# Altium PCB CH32V006K8U6-R0-1v0.PcbDoc
Units mil, origin at the board's own origin, x right, y up, seen from the top; angles counter-clockwise.
Board outline 1653.54 x 1574.8 mil, 2 copper layers (Top Layer, Bottom Layer); 27 components, 45 nets, 148 pads, 199 vias.
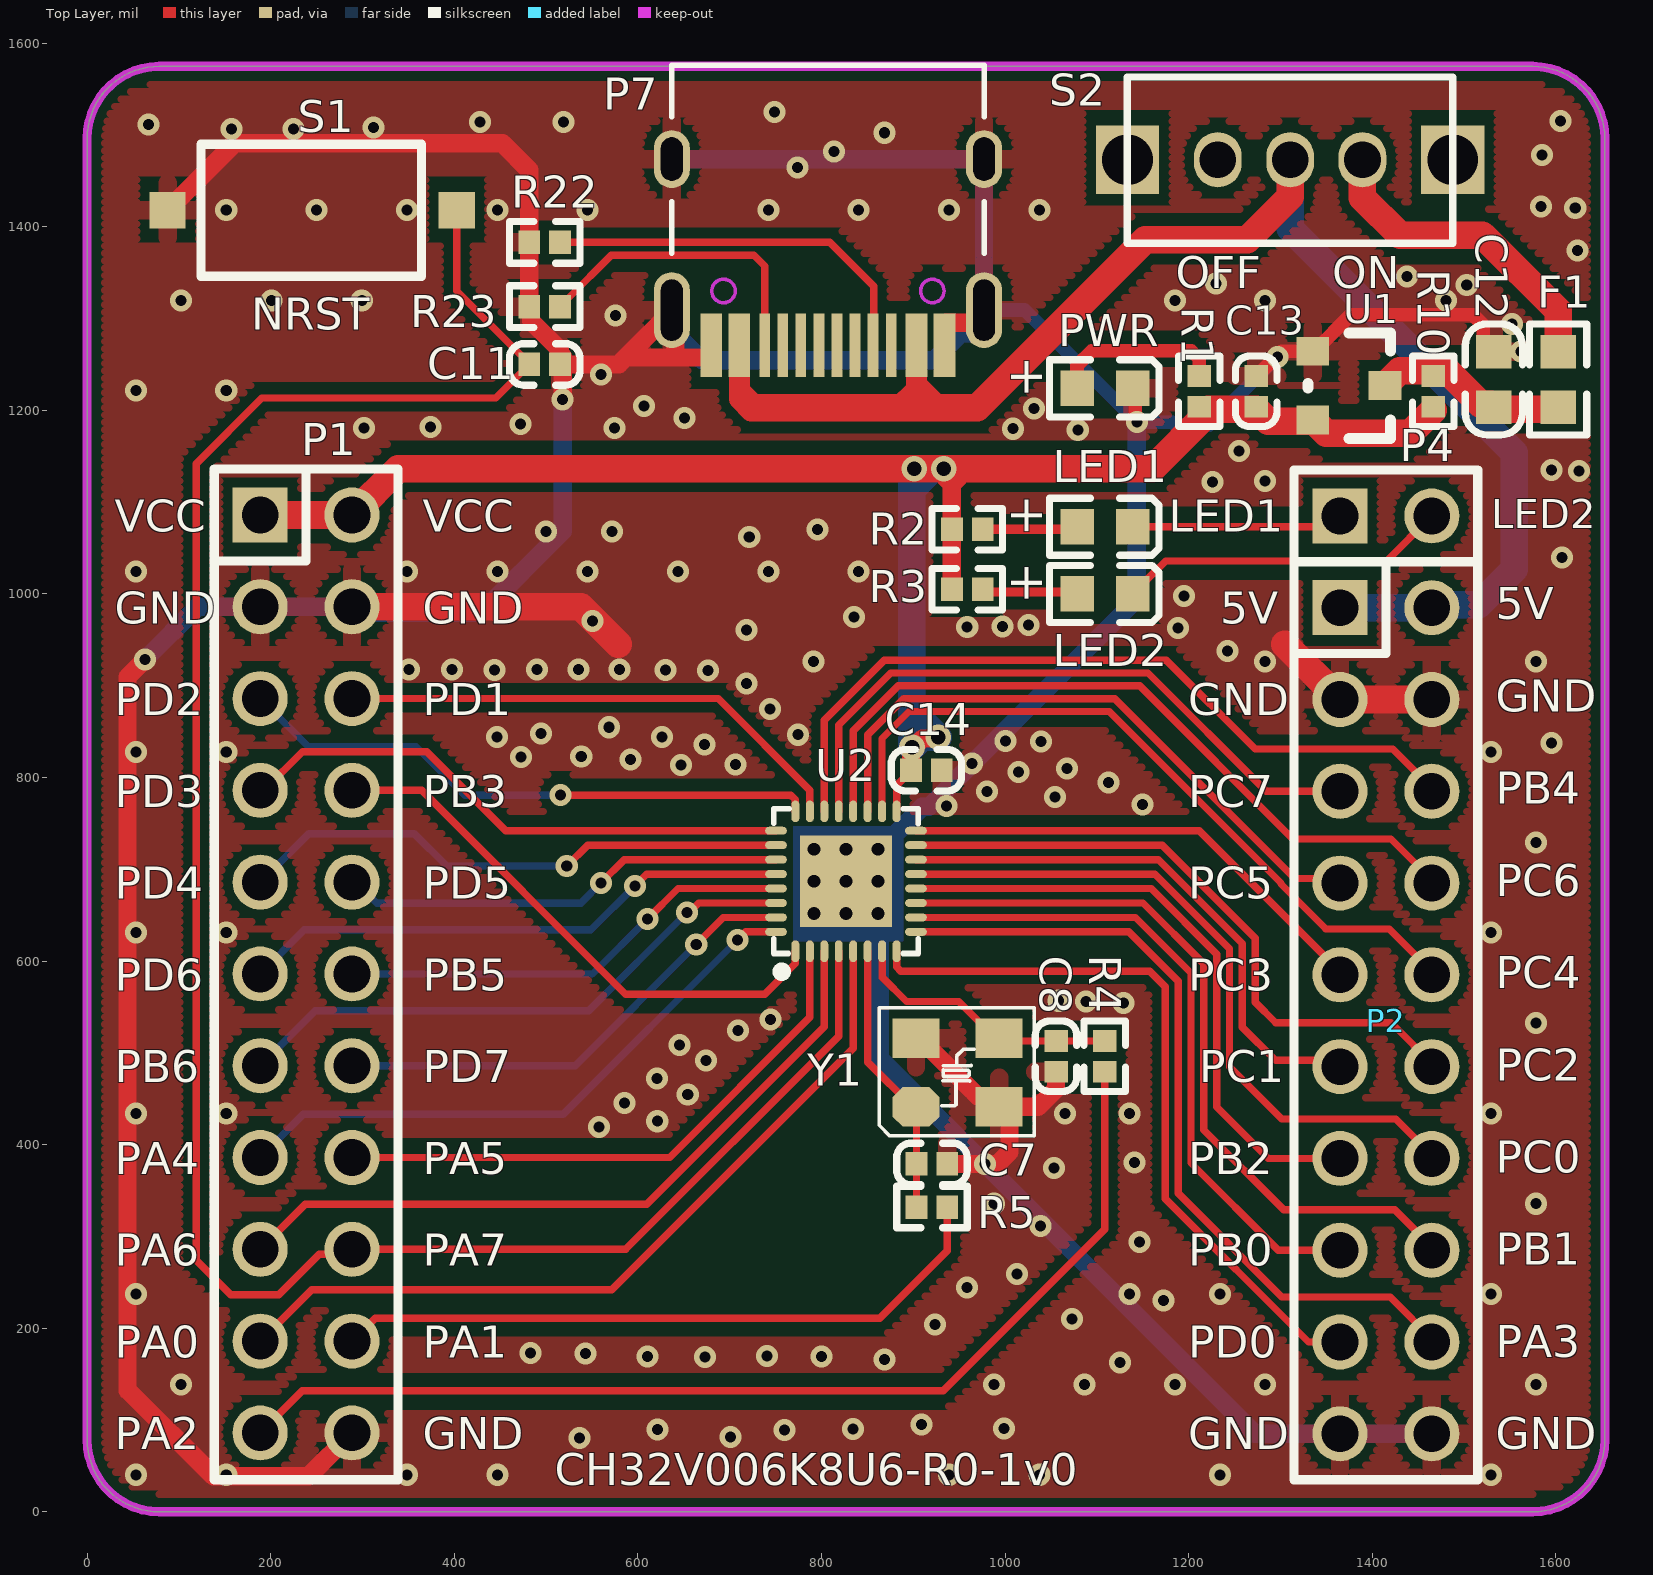
[diagram p0: Top Layer view]
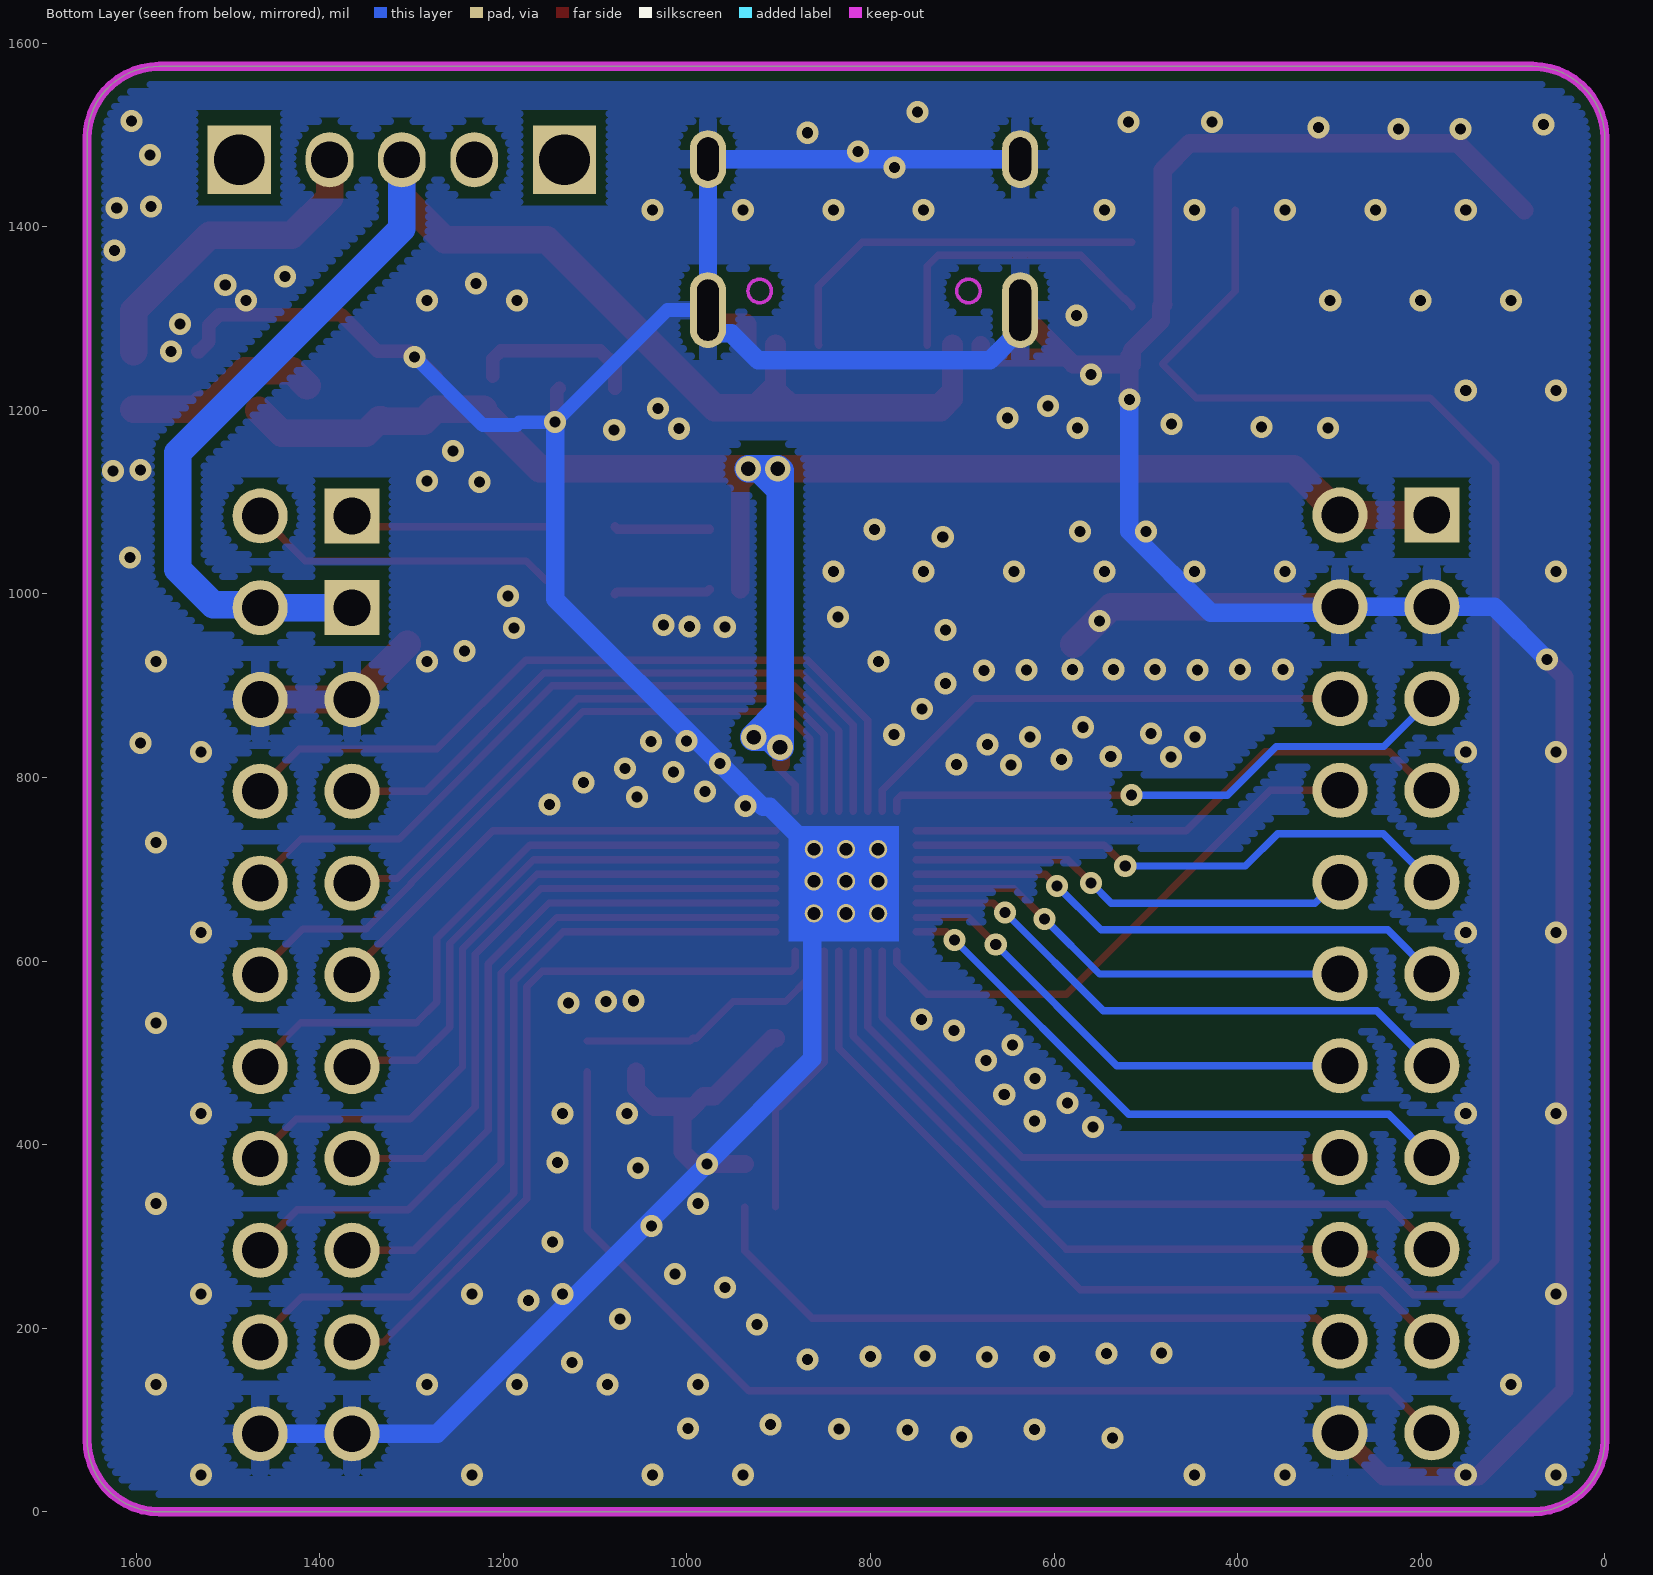
[diagram p1: Bottom Layer view, seen from below]

## Layer stack, top to bottom
Top Solder: solder mask 0.4, Solder Resist, Dk 3.5
Top Layer: signal copper 1.4
Dielectric1: dielectric 12.6, FR-4, Dk 4.8
Bottom Layer: signal copper 1.4
Bottom Solder: solder mask 0.4, Solder Resist, Dk 3.5

## Board outline
0,78.71 0,1496.06 cw(c78.74,1496.06) 78.74,1574.8 1574.8,1574.8 cw(c1574.8,1496.06) 1653.54,1496.06 1653.54,78.74 cw(c1574.8,78.74) 1574.8,0 78.71,0 78.74,0 cw(c78.74,78.74)

## Design rules (kind name [scope] priority, off if disabled: settings)
Clearance Clearance_1 [InPolygon] p1: gap=10 ignorepadtopadclearanceinfootprint=FALSE except(0: Arc-Hole Track-Hole SMDPad-Hole THPad-Hole Via-Hole Fill-Hole Poly-Hole Region-Hole Text-Hole)
Clearance [All] p2: gap=6 ignorepadtopadclearanceinfootprint=FALSE except(0: Arc-Hole Track-Hole SMDPad-Hole THPad-Hole Via-Hole Fill-Hole Poly-Hole Region-Hole Text-Hole)
ComponentClearance [All] p1 off: gap=10 collisioncheckmode=3 verticalgap=10 showdistances=FALSE
DiffPairsRouting [All] p1: maxlimit=10 minlimit=7 mostfreqgap=8 toplayer_minwidth=15 toplayer_maxwidth=15 toplayer_prefwidth=15 bottomlayer_minwidth=15 bottomlayer_maxwidth=15 bottomlayer_prefwidth=15 maxuncoupledlength=500
MinimumSolderMaskSliver [All] p1 off: minsoldermaskwidth=10
PolygonConnect PolygonConnect_1 [IsVia] p1: connectstyle=Direct reliefconductorwidth=10 reliefentries=4 polygonreliefangle="90 Angle" airgapwidth=10
PolygonConnect [All] p2: connectstyle=Relief reliefconductorwidth=20 reliefentries=4 polygonreliefangle="90 Angle" airgapwidth=10
RoutingVias [All] p1: holewidth=16 width=28 viastyle="Through Hole" minholewidth=12 minwidth=24 maxholewidth=28 maxwidth=50
SilkToSilkClearance [All] p1 off: silktosilkclearance=10
SilkToSolderMaskClearance [IsPad] p1 off: minsilkscreentomaskgap=10 clearancetoexposedcopper=TRUE
SolderMaskExpansion [All] p1: expansion=2 istentingtop=FALSE
Width [All] p1: maxlimit=100 minlimit=6 preferedwidth=10
25 further rules are at their usual default settings.

## Components (designator, comment, footprint, x,y, rotation, side; value= is the part's Value field where it differs from the comment)
C7 "22pF" 0402_C 937.09,379 r270 top
C8 "22pF" 0402_C 1055.63,479.54 r180 top
C11 "0.1uF" 0402_C 515.17,1250 r270 top
C12 "10uF" 0603_C 1532.63,1203.37 r90 top
C13 "2.2uF" 0402_C 1273.63,1237.46 r0 top
C14 "0.1uF" 0402_C 897.63,808 r90 top value=15pF
F1 "500mA" 0603 1602.63,1264 r270 top
LED1 "LED1   blue" 0603+ 1078.54,1073.24 r0 top
LED2 "LED2  blue" 0603+ 1078.54,1000 r0 top
P1 "Header 11X2" IDC22-2.54mm 188.54,1086 r0 top
P2 "Header 10X2" IDC20-2.54mm 1365,985 r0 top
P4 "2HEAD" SIP2-2.54mm 1365,1085 r270 top
P7 "TYPE-C" TYPE-C-Receptacle-2.0 807.09,1271 r180 top
PWR "POWER  red" 0603+ 1078.54,1224 r0 top
R1 "1K" 0402 1211.63,1237.46 r270 top
R2 "1K" 0402 942.17,1070.43 r0 top
R3 "1K" 0402 942.17,1005 r0 top
R4 "0R" 0402 1108.63,513 r270 top value=NC(0R)
R5 "0R" 0402 903.63,332 r0 top value=NC(0R)
R10 "0R" 0402 1466.63,1237.46 r270 top value=NC(0R)
R22 "5.1K" 0402 515.17,1383 r180 top
R23 "5.1K" 0402 515.17,1313 r180 top
S1 "NRST" SMD_6.1x3.65x2.5mm-KEY 402.63,1418 r180 top
S2 "SW" SW1 1310.63,1473 r0 top
U1 "6219P33M" SOT-23 1374.63,1227 r270 top
U2 "CH32V006K8U6" QFN32_4X4 826.76,686.91 r0 top
Y1 "24MHz" XT3225 903.08,441.2 r0 top

## Footprints (in the part's own frame and the unit in brackets; to place one, negate y for a bottom-side part, rotate by r counter-clockwise, add the part's x,y. Pads: shape width x height; smd on the part's side, far side on the other; paste and mask are expansions set on the pad)
0402 [mm]
  rect 0.6x0.65 smd mask+0.051: 1(0,0) 2(0.85,0)
  silkscreen extent -0.55,-0.58 1.4,0.57
0402_C [mm]
  rect 0.65x0.6 smd mask+0.051: 1(0,0) 2(0,-0.85)
  silkscreen extent -0.58,-1.4 0.57,0.55
0603 [mm]
  rect 0.93x0.98 smd: 1(0,0) 2(1.54,0)
  silkscreen extent -0.76,-0.79 2.3,0.79
0603+ [mm]
  rect 0.93x0.98 smd: 1(0,0) 2(1.54,0)
  silkscreen extent -0.76,-0.79 2.27,0.79
0603_C [mm]
  rect 0.93x0.98 smd mask+0.051: 1(0,0) 2(1.54,0)
  silkscreen extent -0.76,-0.79 2.31,0.79
IDC20-2.54mm [mil]
  rect 60x60 hole 40: 1(0,0)
  round 60 hole 40: 2(100,0) 3(0,-100) 4(100,-100) 5(0,-200) 6(100,-200) 7(0,-300) 8(100,-300) 9(0,-400) 10(100,-400) 11(0,-500) 12(100,-500) 13(0,-600) 14(100,-600) 15(0,-700) 16(100,-700) 17(0,-800) 18(100,-800) 19(0,-900) 20(100,-900)
  silkscreen extent -50,-950 150,50
IDC22-2.54mm [mil]
  rect 60x60 hole 40: 1(0,0)
  round 60 hole 40: 2(100,0) 3(0,-100) 4(100,-100) 5(0,-200) 6(100,-200) 7(0,-300) 8(100,-300) 9(0,-400) 10(100,-400) 11(0,-500) 12(100,-500) 13(0,-600) 14(100,-600) 15(0,-700) 16(100,-700) 17(0,-800) 18(100,-800) 19(0,-900) 20(100,-900) 21(0,-1000) 22(100,-1000)
  silkscreen extent -50,-1051 150,50
QFN32_4X4 [mm]
  round 0.508 hole 0.356: 0(-0.889,-0.887) 0(-0.889,0.887) 0(0,0) 0(0.889,-0.887) 0(0.889,0.887)
  rect 2.54x2.54 smd mask+0.051: 0(0,0)
  oval 0.22x0.6 smd mask+0.051: 1(-1.4,-1.936) 2(-1,-1.936) 3(-0.6,-1.936) 4(-0.2,-1.936) 5(0.2,-1.936) 6(0.6,-1.936) 7(1,-1.936) 8(1.4,-1.936) 17(1.4,1.936) 18(1,1.936) 19(0.6,1.936) 20(0.2,1.936) 21(-0.2,1.936) 22(-0.6,1.936) 23(-1,1.936) 24(-1.4,1.936)
  oval 0.6x0.22 smd mask+0.051: 9(1.936,-1.4) 10(1.936,-1) 11(1.936,-0.6) 12(1.936,-0.2) 13(1.936,0.2) 14(1.936,0.6) 15(1.936,1) 16(1.936,1.4) 25(-1.936,1.4) 26(-1.936,1) 27(-1.936,0.6) 28(-1.936,0.2) 29(-1.936,-0.2) 30(-1.936,-0.6) 31(-1.936,-1) 32(-1.936,-1.4)
  silkscreen extent -2,-2.63 2,2
SIP2-2.54mm [mil]
  rect 60x60 hole 40: 1(0,0)
  round 60 hole 40: 2(0,100)
  silkscreen extent -50,-50 50,150
SMD_6.1x3.65x2.5mm-KEY [mm]
  rect 1x1 smd: 1(0,0) 2(8,0)
  silkscreen extent 0.98,-1.83 7.08,1.83
SOT-23 [mm]
  rect 0.8x0.9 smd: 1(-0.95,-1) 2(0.95,-1) 3(0,1)
  silkscreen extent -1.46,-1.14 1.46,1.15
SW1 [mm]
  rect 1.75x1.9 hole 1.4: 0(-4.5,0) 0(4.5,0)
  oval 1.321x1.524 hole 1.016: 1(0,0) 2(-2,0) 3(2,0)
  silkscreen extent -4.51,-2.31 4.5,2.29
TYPE-C-Receptacle-2.0 [mm]
  oval 1x2.1 hole 0.6 slot 1.7 at 90 deg: 0(-4.32,-0.97) 0(4.32,-0.97)
  oval 1x1.6 hole 0.6 slot 1.2 at 90 deg: 0(-4.32,-5.15) 0(4.32,-5.15)
  rect 0.6x1.75 smd mask+0.051: A1(-3.225,0) A4(-2.45,0) B1(3.225,0) B4(2.45,0)
  rect 0.3x1.75 smd mask+0.051: A5(-1.25,0) A6(-0.25,0) A7(0.25,0) A8(1.25,0) B5(1.75,0) B6(0.75,0) B7(-0.75,0) B8(-1.75,0)
  Keep-Out Layer circle w0.1: c-2.89,-1.5 r0.325
  Keep-Out Layer circle w0.1: c2.89,-1.5 r0.325
  silkscreen extent -4.32,-7.75 4.32,-2.55
XT3225 [mm]
  oct 1.3x1.1 smd: 1(0,0)
  rect 1.3x1.1 smd: 2(2.3,0) 3(2.3,1.9) 4(0,1.9)
  silkscreen extent -1.02,-0.8 3.27,2.74

## Part data
C7 C8 C12 C13: library part CAP, "Capacitor"
C11 C14: library part Cap, "Capacitor", LatestRevisionDate=17-Jul-2002, LatestRevisionNote="Re-released for DXP Platform.", PackageReference=RAD-0.3, Published=8-Jun-2000, Publisher="Altium Limited"
F1: library part FUSE1, "Fuse"
LED1 LED2 PWR: library part LED0, "Typical INFRARED GaAs LED", LatestRevisionDate=08-Jul-2005, LatestRevisionNote="Mech Layer 1 removed.", PackageReference=LED-0, Published=8-Jun-2000, Publisher="Altium Limited"
P1: "Header, 11-Pin, Dual row", LatestRevisionDate=17-Jul-2002, LatestRevisionNote="Re-released for DXP Platform.", Publisher="Altium Limited"
P2: "Header, 10-Pin, Dual row", LatestRevisionDate=17-Jul-2002, LatestRevisionNote="Re-released for DXP Platform.", Publisher="Altium Limited"
P7: library part TYPE-C1
R1 R2 R3 R4 R5 R10: library part "Res Semi", "Semiconductor Resistor", LatestRevisionDate=17-Jul-2002, LatestRevisionNote="Re-released for DXP Platform.", PackageReference=AXIAL-0.5, Published=8-Jun-2000, Publisher="Altium Limited"
R22 R23: library part Res2, "Resistor"
S1: library part KEY
U2: "RISC-V MCU, 48MHz, ADC/OPA/2*UART/I2C/SPI"
Y1: library part XTAL, "Crystal Oscillator", LatestRevisionDate=17-Jul-2002, LatestRevisionNote="Re-released for DXP Platform.", PackageDescription="Crystal, Thru-Hole; 2 Leads; Body 3.1 x 8.2 mm (Dia.xH)", PackageReference=R38, Published=8-Jun-2000, Publisher="Altium Limited"

## Via types
v1: diameter 24, hole 12, Top Layer to Bottom Layer, tented both sides, 131 vias
v2: diameter 24.02, hole 12, Top Layer to Bottom Layer, tented both sides, 60 vias
v3: diameter 28, hole 16, Top Layer to Bottom Layer, tented both sides, 4 vias
v4: diameter 20, hole 14, Top Layer to Bottom Layer, tented both sides, 4 vias

## Nets (pads, with @x,y where several pads share a name; then routed paths per layer and width w, separated by ;. In a path a pad name is that pad's centre, name@x,y a point inside that pad or via, vN(x,y) a via of type N, cw(c..) or ccw(c..) an arc to the next point about the centre after c; other vN are vias at no path point)
+5V: P2.1 P2.2 P7.A4 P7.B4 S2.1 | length 1680.7
  Top Layer w23: P7.B4 710.63,1221.55 ; 722.98,1209.2 710.63,1221.55 ; 723.38,1199.58 710.63,1212.32 710.63,1221.55 ; 883.63,1203 903.54,1222.91 903.54,1228.09 ; P7.A4 903.54,1228.09 ; 928.63,1203 903.54,1228.09
  Top Layer w30: 725.63,1203 883.63,1203 928.63,1203 969.63,1203 1152.63,1386 1264.06,1386 1310.63,1432.57 S2.1
  Bottom Layer w30: S2.1 1310.63,1397.87 1554.77,1153.73 1554.77,1026.96 1516,988.19 1468.19,988.19 P2.2 P2.1
GND: C7.1 C8.1 C11.1 C12.2 C13.1 C14.2 P1.3 P1.4 P1.22 P2.3 P2.4 P2.19 P2.20 P7.0 P7.A1 P7.B1 PWR.2 R22.2 R23.2 S1.2 U1.1 U2.0 Y1.2 Y1.4 | length 6913
  Top Layer w15: PWR.2 1141.91,1221.27 1141.91,1188.81 v1(1143.63,1187.09) ; C13.1 1274.61,1237.46 1301.55,1264.4 U1.1 1337.23,1264.4 1377.08,1304.26 1509.5,1304.26 1520.95,1292.81 1520.95,1274.81 1531.76,1264 C12.2
  Top Layer w20: v1(63.24,928.69) 43.97,909.42 43.97,132.62 137.91,38.68 241.23,38.68 P1.22 ; S1.2 160.67,1491 452.35,1491 481.71,1461.64 R22.2 481.71,1315.8 481.17,1315.26 483.52,1312.91 483.52,1297.42 515.17,1265.77 C11.1 C11.1@518.05,1250 ; v1(518.05,1211.98) C11.1@518.05,1250 ; C11.1@518.05,1258.71 C11.1@518.05,1250 ; 591.41,1257.66 640.71,1257.66 ; P7.0@622.33,1293.29 579.04,1250 C11.1@518.05,1250 ; P7.0@637.01,1309.19 640.71,1305.48 640.71,1257.66 ; P7.B1 680.12,1259.47 678.31,1257.66 640.71,1257.66 ; Y1.4 907.02,516 970.17,452.85 981.98,452.85 Y1.2 ; P7.A1 934.05,1293.64 935.87,1295.45 968.22,1295.45 977.17,1304.4 P7.0@977.17,1309.19 ; C7.1 v1(978.28,379) 991.75,379 1004.84,392.09 1004.84,429.99 Y1.2 ; C8.1 1055.63,460.81 1036.02,441.2 Y1.2
  Top Layer w30: P1.4 537.85,986 578.7,945.16 ; 1304.84,945.16 P2.3 P2.4
  Bottom Layer w15: P7.0@977.17,1309.19 1021.53,1309.19 v1(1143.63,1187.09) 1182.8,1187.09 1185.89,1184 1222.63,1184 v1(1296.63,1258)
  Bottom Layer w20: v1(63.24,928.69) 120.55,986 P1.3 P1.4 295,979.55 429.39,979.55 518.05,1068.21 v1(518.05,1211.98) ; P7.0@637.01,1309.19 637.01,1287.54 669.99,1254.55 922.53,1254.55 951.81,1283.83 968.22,1283.83 977.17,1292.78 977.17,1309.19 977.17,1473.76 P7.0@637.01,1473.76 ; v1(1143.63,1187.09) 1143.63,994.53 v1(964.13,815.03) 917.16,768.06 909.84,768.06 863.63,721.85 863.63,686.91 863.63,651.98 863.63,493.65 v1(978.28,379) 1272.28,85 P2.19 P2.20
  other v1: 536.38,80.47 700.97,81.34 759.98,88.9 621.44,89.7 834.21,90.05 998.8,90.92 908.99,95.34 1125.29,162.84 868.92,165.85 610.48,169.23 673.08,168.68 799.92,169.23 740.62,169.78 483.09,173.07 542.94,172.52 923.93,204.21 1072.83,210.23 1172.46,230.06 958.85,244.18 1013.17,258.88 1146.5,293.85 1038.89,311.13 1053.61,374.72 1141.15,380.69 557.67,419.16 621.15,425.51 1065.37,433.93 585.5,445.53 654.36,454.81 620.66,471.9 674.38,491.44 645.57,508.53 708.99,524.24 744.61,536.46 1128.99,554.34 1088.36,555.96 1058.3,556.78 936.47,769.11 1149.7,770.7 1054.66,778.69 980.39,784.68 1112.96,794.66 1014.73,805.84 1067.44,809.84 647.02,813.83 706.23,814.33 592.15,819.57 472.5,822.19 538.33,822.71 672.41,835.78 1595.21,837.78 1039.08,839.04 1000.58,839.65 446.37,844.13 626.22,844.02 774.5,846.6 494.24,848.15 568.48,854.75 743.99,874.86 718.61,902.17 443.97,916.94 630.27,916.94 676.54,916.61 350.49,917.59 397.39,917.59 489.9,917.59 535.19,917.59 579.84,917.59 1242.52,937.59 718.4,960.79 1188.46,962.97 958.86,963.75 997.51,964.53 1025.63,966.09 550.52,970.47 835.69,974.78 1195.1,997.72 1606.84,1039.49 721.36,1062.21 499.84,1067.87 571.79,1067.87 795.74,1070.29 1225.98,1121.91 1625.44,1133.74 1595.43,1134.93 1255.01,1155.87 1079.27,1178.68 1008.77,1179.97 301.84,1180.97 574.65,1180.97 374.32,1181.78 472.04,1185.04 650.82,1191.46 1031.84,1201.86 606.49,1204.6 559.69,1239.08 1561.92,1264 1552.16,1294.06 575.46,1303.12 1503.06,1336.42 1230.07,1338.32 1437.8,1345.93 1623.91,1373.92 1621.27,1420.46 1583.96,1421.93 774.14,1464.79 1584.8,1478.05 813.83,1482.08 868.77,1502.43 157.1,1506.58 224.59,1506.58 311.88,1508.33 66.91,1511.24 427.9,1514.18 518.77,1514.18 1605.4,1515.14 748.71,1524.82
  other v2: 53.15,40.35 151.57,40.35 348.43,40.35 446.85,40.35 938.98,40.35 1037.4,40.35 1234.25,40.35 1529.53,40.35 102.36,138.78 988.19,138.78 1086.61,138.78 1185.04,138.78 1283.46,138.78 1578.74,138.78 53.15,237.2 1135.83,237.2 1234.25,237.2 1529.53,237.2 988.19,335.63 1578.74,335.63 53.15,434.06 151.57,434.06 1135.83,434.06 1529.53,434.06 1578.74,532.48 53.15,630.91 151.57,630.91 1529.53,630.91 1578.74,729.33 53.15,827.76 151.57,827.76 1529.53,827.76 791.34,926.18 1283.46,926.18 1578.74,926.18 53.15,1024.61 348.43,1024.61 446.85,1024.61 545.28,1024.61 643.7,1024.61 742.13,1024.61 840.55,1024.61 1283.46,1123.03 53.15,1221.46 151.57,1221.46 102.36,1319.88 200.79,1319.88 299.21,1319.88 1185.04,1319.88 1283.46,1319.88 1480.32,1319.88 151.57,1418.31 250,1418.31 348.43,1418.31 446.85,1418.31 545.28,1418.31 742.13,1418.31 840.55,1418.31 938.98,1418.31 1037.4,1418.31
  other v4: 826.76,651.98 791.76,686.91 861.76,686.91 826.76,721.85
LED1: LED1.2 P4.1 | length 230.7
  Top Layer w8: LED1.2 1353.24,1073.24 P4.1
LED2: LED2.2 P4.2 | length 361.6
  Top Layer w8: LED2.2 1139.17,1000.98 1153.48,1015.29 1154.46,1015.29 1175.1,1035.93 1415.93,1035.93 P4.2
NetC12_1: C12.1 F1.2 R10.1 U1.3 | length 211.7
  Top Layer w30: U1.3 1430,1243 1481.93,1243 1518.26,1206.68 1529.32,1206.68 C12.1 ; C12.1@1532.63,1201.37 F1.2@1602.63,1201.37
NetF1_1: F1.1 S2.3 | length 349.9
  Top Layer w30: S2.3 1389.37,1431.82 1430.44,1390.75 1520.2,1390.75 1602.63,1308.32 F1.1
NetLED1_1: LED1.1 R2.2 | length 104.1
  Top Layer w10: R2.2 1075.73,1070.43 LED1.1
NetLED2_1: LED2.1 R3.2 | length 105
  Top Layer w10: R3.2 978.53,1002.1 1076.44,1002.1 LED2.1
NetP7_A5: P7.A5 R22.1 | length 426.3
  Top Layer w8: R22.1 809.24,1383 857.14,1335.09 857.14,1271.85 P7.A5
NetP7_B5: P7.B5 R23.1 | length 338
  Top Layer w8: R23.1 515.17,1313.98 522.98,1321.8 523.97,1321.8 571.17,1369 726.53,1369 738.19,1357.34 P7.B5
NetPWR_1: PWR.1 R1.1 | length 187.1
  Top Layer w15: PWR.1 1078.54,1248.91 1094.63,1265 1202.84,1265 1211.63,1256.21 R1.1
NRST: C11.2 P1.18 S1.1 U2.4 | length 2401.1
  Top Layer w8: S1.1 402.63,1330.06 481.71,1250.98 C11.2 445.17,1213.46 190.42,1213.46 118.77,1141.81 118.77,274.11 156.52,236.37 208.64,236.37 252.94,280.67 283.21,280.67 P1.18 586.63,286 818.88,518.25 U2.4
PA0: P1.19 U2.5 | length 883.9
  Top Layer w8: P1.19 244.54,242 571.63,242 834.63,505 U2.5
PA1: P1.20 R5.2 | length 736.9
  Top Layer w8: P1.20 289.25,186 314.07,210.82 863.45,210.82 937.09,284.46 R5.2
PA2: P1.21 R4.2 | length 1183.6
  Top Layer w8: P1.21 234.54,132 932.63,132 1108.63,308 R4.2
PA3: P2.18 U2.9 | length 886
  Top Layer w8: U2.9 1134.83,631.8 1188.63,578 1188.63,347 1301.63,234 1419.54,234 P2.18@1468.54,185
PA4: P1.15 U2.32 | length 663.8
  Top Layer w8: v1(708.53,622.9) 717.43,631.8 U2.32
  Bottom Layer w8: P1.15 235.54,433 518.63,433 v1(708.53,622.9)
PA5: P1.16 U2.2 | length 634.1
  Top Layer w8: P1.16 634.63,386 787.39,538.76 U2.2
PA6: P1.17 U2.3 | length 797.2
  Top Layer w8: P1.17 237.54,335 609.63,335 803.14,528.51 U2.3
PB0: P2.15 U2.10 | length 737
  Top Layer w8: U2.10 1142.09,647.54 1202.63,587 1202.63,380 1297.63,285 P2.15 P2.15@1368.54,285
PB1: P2.16 U2.11 | length 828.3
  Top Layer w8: U2.11 1150.34,663.29 1216.63,597 1216.63,416 1303.63,329 1424.54,329 P2.16@1468.54,285
PB2: P2.13 U2.12 | length 685
  Top Layer w8: U2.12 1159.19,679.04 1230.63,607.6 1230.63,441 1286.63,385 P2.13 P2.13@1368.54,385
PB3: P1.8 U2.1 | length 602.2
  Top Layer w8: P1.8 364.63,786 586.63,564 738.24,564 771.64,597.4 U2.1
PB4: P2.6 U2.22 | length 851.1
  Top Layer w8: U2.22 803.14,862.51 868.55,927.92 1175.71,927.92 1272.63,831 1422.54,831 P2.6@1468.54,785
PB5: P1.12 U2.29 | length 500.5
  Top Layer w8: v1(610.63,646) 643.67,679.04 U2.29
  Bottom Layer w8: P1.12 550.63,586 v1(610.63,646)
PB6: P1.13 U2.30 | length 635.4
  Top Layer w8: v1(653.63,653) 656.02,653 666.32,663.29 U2.30
  Bottom Layer w8: P1.13 248.54,546 546.63,546 v1(653.63,653)
PC0: P2.14 U2.13 | length 769.1
  Top Layer w8: U2.13 1163.24,694.79 1244.63,613.4 1244.63,485 1301.63,428 1425.54,428 P2.14@1468.54,385
PC1: P2.11 U2.14 | length 612.4
  Top Layer w8: U2.14 1167.3,710.54 1258.63,619.2 1258.63,528 1294.63,492 1361.54,492 P2.11@1368.54,485
PC2: P2.12 U2.15 | length 706.5
  Top Layer w8: U2.15 1171.35,726.28 1272.63,625 1272.63,555 1294.63,533 1420.54,533 P2.12@1468.54,485
PC3: P2.9 U2.16 | length 530.6
  Top Layer w8: U2.16 1211.51,742.03 P2.9@1368.54,585
PC4: P2.10 U2.18 | length 813.6
  Top Layer w8: U2.18 866,763.26 866,842.49 895.43,871.92 1113.71,871.92 1300.63,685 1300.63,684 1349.63,635 1418.54,635 P2.10@1468.54,585
PC5: P2.7 U2.19 | length 701.2
  Top Layer w8: U2.19 850.38,846.67 889.63,885.92 1119.71,885.92 1315.63,690 1363.54,690 P2.7@1368.54,685
PC6: P2.8 U2.20 | length 831.1
  Top Layer w8: U2.20 834.63,851 883.55,899.92 1146.71,899.92 1313.63,733 1420.54,733 P2.8@1468.54,685
PC7: P2.5 U2.21 | length 720.7
  Top Layer w8: U2.21 818.88,857.25 875.55,913.92 1155.71,913.92 1284.63,785 P2.5@1368.54,785
PD0: P2.17 U2.8 | length 808.4
  Top Layer w8: U2.8 881.88,593.69 886.56,589 1157.83,589 1174.63,572.2 1174.63,341 1330.63,185 P2.17@1368.54,185
PD1: P1.6 U2.23 | length 563.3
  Top Layer w8: P1.6 687.63,886 787.39,786.24 U2.23
PD2: P1.5 U2.24 | length 641.4
  Top Layer w8: v1(515.77,780.85) 766.62,780.85 771.51,775.96 771.51,763.26 U2.24
  Bottom Layer w8: P1.5 240.73,833.81 358.13,833.81 411.1,780.85 v1(515.77,780.85)
PD3: P1.7 U2.25 | length 615.2
  Top Layer w8: P1.7 192.54,786 234.72,828.18 370,828.18 456.15,742.03 U2.25
PD4: P1.9 U2.26 | length 607.9
  Top Layer w8: v1(522.54,703.5) 545.32,726.28 U2.26
  Bottom Layer w8: P1.9 241.38,738.83 356.47,738.83 391.8,703.5 v1(522.54,703.5)
PD5: P1.10 U2.27 | length 491.2
  Top Layer w8: v1(559.81,685.18) 585.17,710.54 U2.27
  Bottom Layer w8: P1.10 292.89,686 315.89,663 537.63,663 v1(559.81,685.18)
PD6: P1.11 U2.28 | length 607.1
  Top Layer w8: v1(597,682) 609.79,694.79 U2.28
  Bottom Layer w8: P1.11 236.54,634 549,634 v1(597,682)
PD7: P1.14 U2.31 | length 528.9
  Top Layer w8: v1(663.63,618) 693.17,647.54 U2.31
  Bottom Layer w8: P1.14 531.63,486 v1(663.63,618)
VCC: C13.2 C14.1 P1.1 P1.2 R1.2 R2.1 R3.1 R10.2 U1.2 U2.17 | length 2082.9
  Top Layer w8: U2.17 882,763.26 882,791.39 897.63,807.02 C14.1@897.63,815
  Top Layer w20: C14.1@897.63,815 v3@897.63,832 ; v3(898.63,833) v3@897.63,832 ; v3@921.32,1136.49 925.22,1136.49 942.17,1119.55 ; v3(927.15,843.97) 925.62,842.44 910.23,842.44 899.79,832 v3@897.63,832 ; v3@941.53,1136.49 942.17,1135.85 942.17,1119.55 ; R3.1 R2.1 942.17,1119.55 ; 959.11,1136.49 942.17,1119.55
  Top Layer w30: P1.1 P1.2 339.03,1136.49 v3(901.11,1136.49) v3@921.32,1136.49 ; v3@925.22,1136.49 v3(933.37,1136.49) 941.53,1136.49 959.11,1136.49 1160.42,1136.49 1221.63,1197.7 1221.63,1201 1273.63,1201 1286.63,1188 1331.69,1188 1333.29,1189.6 U1.2 1349.86,1175 1441.63,1175 R10.2@1466.63,1200
  Bottom Layer w30: v3(933.37,1136.49) v3@921.02,1136.49 ; 898.63,872.49 898.63,1114.1 ; 898.63,872.49 v3(927.15,843.97) 909.6,843.97 v3(898.63,833) 898.63,872.49 ; 898.63,1114.1 v3@921.02,1136.49 ; 898.63,1114.1 898.63,1134.01 v3(901.11,1136.49) v3@921.02,1136.49
XI: C7.2 R5.1 U2.6 Y1.1 | length 303.1
  Top Layer w8: U2.6 850.38,489.96 899.14,441.2 Y1.1 903.63,440.65 C7.2 R5.1
XO: C8.2 R4.1 U2.7 Y1.3 | length 299.5
  Top Layer w8: U2.7 866.13,582.5 892.63,556 949.69,556 989.69,516 Y1.3 996.63,513 C8.2 R4.1
pads on no net: P7.A6 P7.A7 P7.A8 P7.B6 P7.B7 P7.B8 S2.0 S2.2

## Polygon pours and split planes (outlines as drawn)
GND on Bottom Layer "GND" (hatched Horizontal grid 8 track 8, remove dead copper, pour order 1): 1653.54,1574.8 1653.54,0 0,0 0,1574.8
GND on Top Layer "GND" (hatched Horizontal grid 8 track 8, remove dead copper, pour order 0): 78.62,1574.8 1653.54,1574.8 1653.54,0 0,0 0,1574.8

## Keep-outs
Keep-Out Layer:
  the board outline again, w10

## Other copper
Bottom Layer:
  rectangle net GND: 769.03,621.12 889.25,747.38

## Silkscreen, mask and mechanical layers (free items; w line width, h text height)
Top Overlay:
  text "OFF" at 1186.2,1333.12 h35
  text "ON" at 1356.66,1333.12 h35
  text "LED2" at 1529.49,1071.66 h32
  text "VCC" at 30.18,1067.66 h35
  text "VCC" at 365.61,1067.66 h35
  text "LED1" at 1178.4,1067.66 h35
  text "5V" at 1534.49,972.2 h35
  text "GND" at 30.18,967.7 h35
  text "GND" at 365.61,967.7 h35
  text "5V" at 1234.71,967.7 h35
  text "GND" at 1534.49,871.73 h35
  text "PD2" at 30.18,867.73 h35
  text "PD1" at 365.61,867.73 h35
  text "GND" at 1199.72,867.73 h35
  text "PB4" at 1534.49,771.26 h35
  text "PD3" at 30.18,767.76 h35
  text "PB3" at 365.61,767.76 h35
  text "PC7" at 1199.72,767.76 h35
  text "PC6" at 1534.49,670.8 h35
  text "PD4" at 30.18,667.8 h35
  text "PD5" at 365.61,667.8 h35
  text "PC5" at 1199.72,667.8 h35
  text "PC4" at 1534.49,570.33 h35
  text "PD6" at 30.18,567.83 h35
  text "PB5" at 365.61,567.83 h35
  text "PC3" at 1199.72,567.83 h35
  text "PC2" at 1534.49,469.87 h35
  text "PB6" at 30.18,467.87 h35
  text "PD7" at 365.61,467.87 h35
  text "PC1" at 1211.39,467.87 h35
  text "PC0" at 1534.49,369.4 h35
  text "PA4" at 30.18,367.9 h35
  text "PA5" at 365.61,367.9 h35
  text "PB2" at 1199.72,367.9 h35
  text "PB1" at 1534.49,268.93 h35
  text "PA6" at 30.18,267.93 h35
  text "PA7" at 365.61,267.93 h35
  text "PB0" at 1199.72,267.93 h35
  text "PA0" at 30.18,167.97 h35
  text "PA1" at 365.61,167.97 h35
  text "PD0" at 1199.72,167.97 h35
  text "PA3" at 1534.49,168.47 h35
  text "PA2" at 30.18,68 h35
  text "GND" at 365.61,68 h35
  text "GND" at 1199.72,68 h35
  text "GND" at 1534.49,68 h35
  text "CH32V006K8U6-R0-1v0" at 509.27,28.77 h35
Mechanical 1:
  the board outline again, w10

## Text inside footprints (layer, text, board x,y; h text height)
LED1: Top Overlay "+" at 1040.47,1062.26 h40 r90
LED2: Top Overlay "+" at 1040.47,989.01 h40 r90
PWR: Top Overlay "+" at 1040.47,1213.01 h40 r90